# EAGLE board sonda2 (EAGLE 4.16)
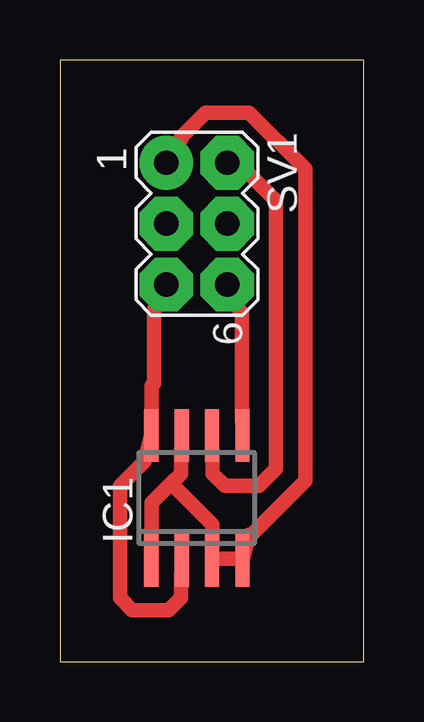
[diagram p0: board, top side]

Size 12.68 x 25.07 mm. Coordinates in mm from the lower left corner, seen from the top.
Outline: 0,0 12.68,0 12.68,25.07 0,25.07 0,0
Copper layers (1*16): Top 0.035mm / dielectric 1.5mm / Bottom 0.035mm
Design rules "mio2": minimum track width 24mil, minimum drill 24mil, track to track 24mil, track to pad 24mil, pad to pad 24mil, via to via 24mil, smd to smd 24mil, copper to edge 40mil, drill to drill 8mil, minimum pad ring 24mil, minimum via ring 24mil, stop-mask expansion 4mil, vias tented up to drill 0mil, thermal gap 10mil

## Footprints (pad centres in the part's own frame; a part is rotated, then mirrored left to right if it is on the bottom)
SO-08 = smd 0.6 x 2.2: 1 -1.905,-2.6; 2 -0.635,-2.6; 3 0.635,-2.6; 4 1.905,-2.6; 5 1.905,2.6; 6 0.635,2.6; 7 -0.635,2.6; 8 -1.905,2.6
MA03-2 = drill 1.016 round: 1 -2.54,-1.27 | drill 1.016 octagon: 2 -2.54,1.27; 3 0,-1.27; 4 0,1.27; 5 2.54,-1.27; 6 2.54,1.27

## Placement (x,y rotation side)
IC1  24LC16BSN  [SO-08]  5.71,6.82 0 top
SV1  [MA03-2]  5.71,18.25 270 top
U$1  [A4P-LOC]  -90.81,-123.99 0 top  (outside the outline)

## Library data of the parts
IC1 = microchip
SV1 = con-lstb
U$1 = frames

## Nets
GND: IC1.1 IC1.3 IC1.4 IC1.7 SV1.1
N$1: IC1.6 SV1.2
N$2: IC1.5 SV1.6
VCC: IC1.2 IC1.8 SV1.5

## Tracks (layer width: path | path; a pad name or v marks a point on that pad's centre or on a via)
GND
  Top 0.61: 4.64,7.43 5.05,7.84 5.05,8.34 IC1.7 | 4.64,7.43 3.83,6.62 3.83,5.3 IC1.1 | 4.64,7.43 6.37,5.7 6.37,5.3 IC1.3 6.57,4.28 7.39,4.28 IC1.4 7.89,5.3 8,5.3 10.23,7.53 10.23,20.54 7.89,22.87 6.07,22.87 5.05,21.86 5.05,21.75 SV1.1
N$1
  Top 0.61: IC1.6 6.37,8.34 6.37,7.84 6.88,7.33 8.3,7.33 9.01,8.04 9.01,19.21 8,20.23 SV1.2
N$2
  Top 0.61: IC1.5 7.59,10.48 7.59,14.54 7.49,14.64 SV1.6
VCC
  Top 0.61: IC1.2 5.05,3.16 5.05,2.65 4.54,2.15 3.02,2.15 2.51,2.65 2.51,7.33 3.53,8.34 IC1.8 3.83,10.48 3.83,11.49 3.93,11.59 3.93,14.64 SV1.5

## Text on the board
Pads: www.pyacqua.net